# EAGLE board overallPCB (EAGLE 9.0.1)
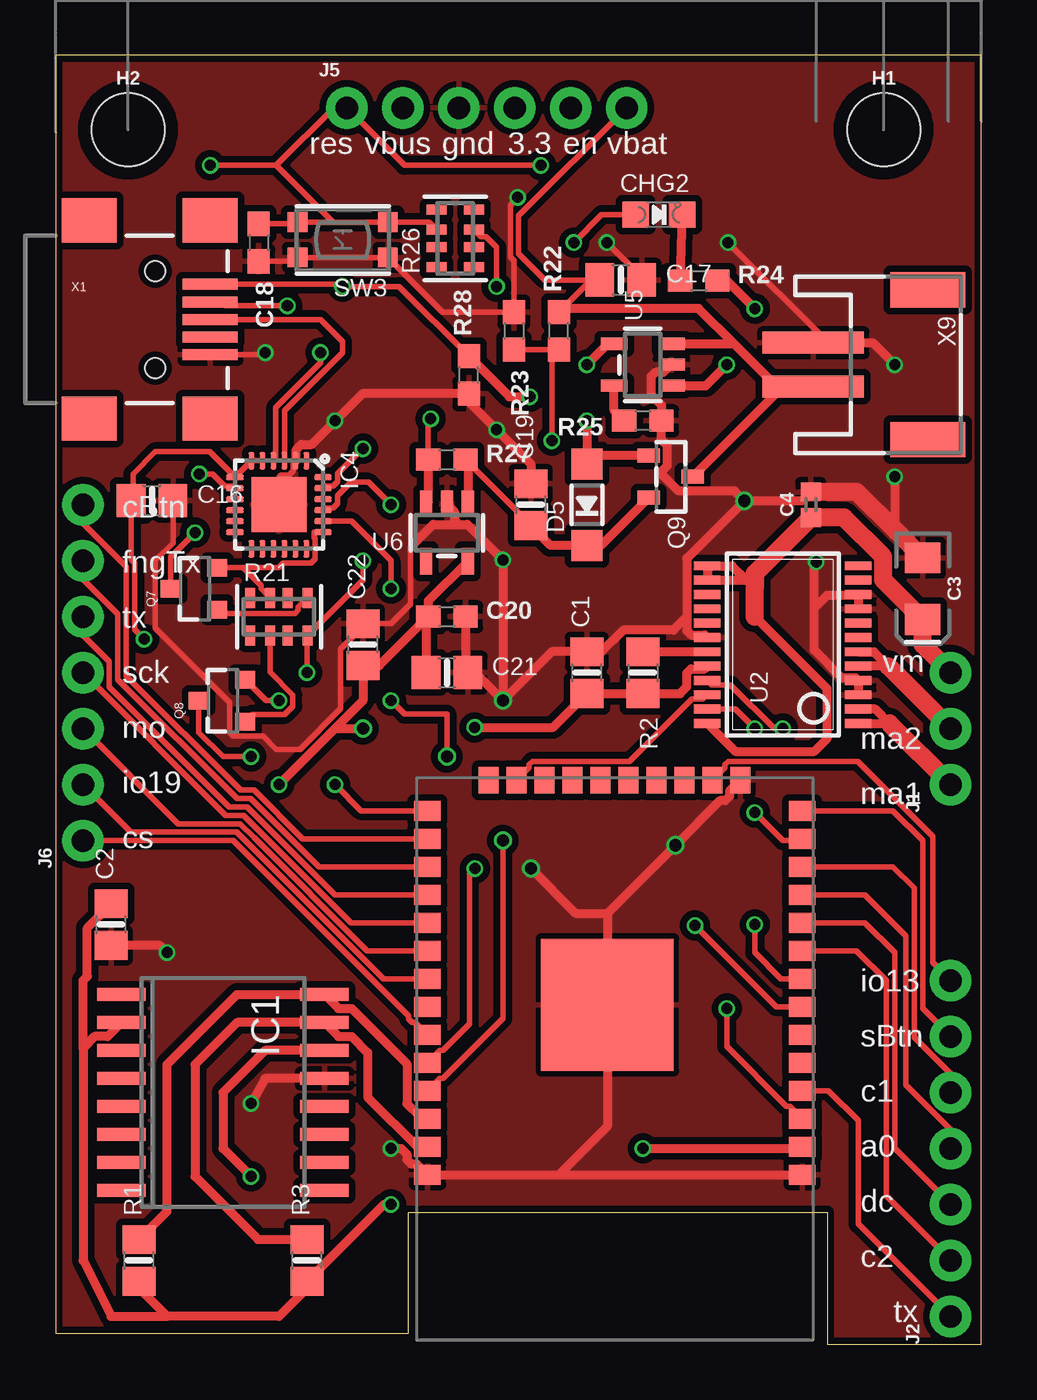
[diagram p0: board, top side]
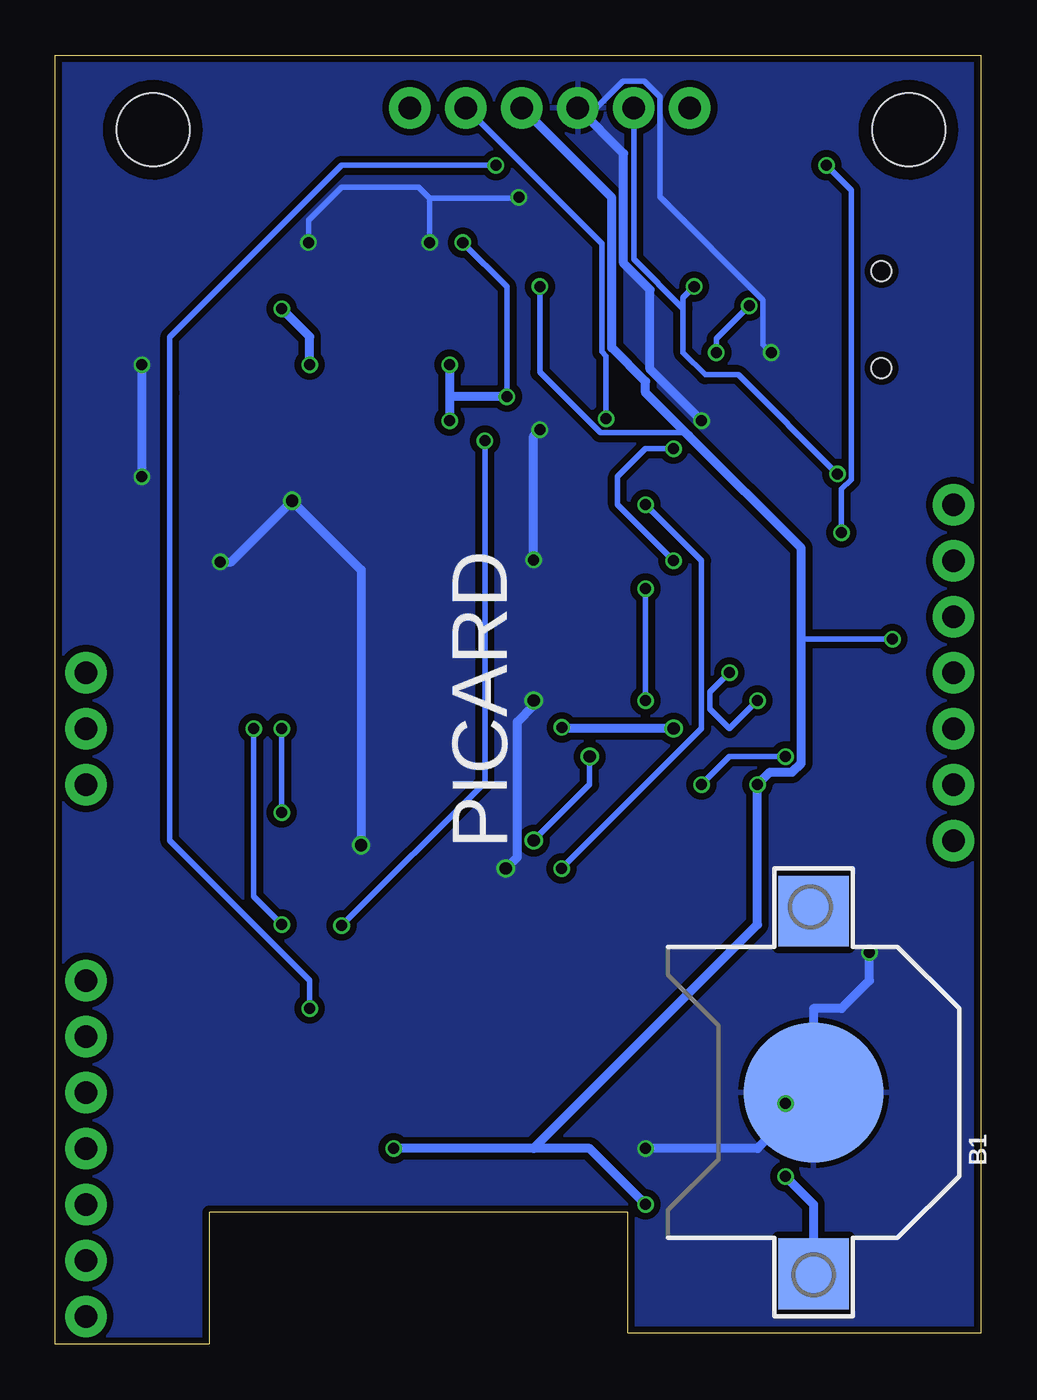
[diagram p1: board, bottom side, seen from below]

Size 42.04 x 58.5 mm. Coordinates in mm from the lower left corner, seen from the top.
Outline: 0.04,58.36 0.04,0.5 16.04,0.5 16.04,6 35.04,6 35.04,0 42.04,0 42.04,58.5 0.04,58.5 0.04,58.36
Outline: 0.04,58.36 0,58.36
Copper layers (1*16): Top 0.035mm / dielectric 1.5mm / Bottom 0.035mm
Design rules "SparkFun *": minimum track width 3.5mil, minimum drill 0.2mm, track to track 5mil, track to pad 5mil, pad to pad 5mil, via to via 5mil, smd to smd 5mil, copper to edge 8mil, drill to drill 8mil, minimum pad ring 12mil, minimum via ring 3mil, stop-mask expansion 4mil, vias tented up to drill 20mil, thermal gap 10mil

## Footprints (pad centres in the part's own frame; a part is rotated, then mirrored left to right if it is on the bottom)
CR1220 = smd 3.2 x 3.2: +$1 -8.225,0; +$2 8.225,0 | smd 6.35 x 6.35: - 0,0
0805-NO = smd 1.3 x 1.5: 1 -0.95,0; 2 0.95,0
EIA3216 = smd 1.4 x 1.6: + 1.4,0; - -1.4,0
0402 = smd 0.85 x 0.9: 1 -0.58,0; 2 0.58,0
0603-NO = smd 1.1 x 1: 1 -0.85,0; 2 0.85,0
CHIPLED_0805_NOOUTLINE = smd 1.2 x 1.2: A 0,-1.05; C 0,1.05
SOD-123 = smd 1.4 x 1.4: A 1.85,0; C -1.85,0
STAND-OFF = hole 3.302: 0,0
SO16W = smd 0.6 x 2.2: 1 -4.445,-4.6; 2 -3.175,-4.6; 3 -1.905,-4.6; 4 -0.635,-4.6; 5 0.635,-4.6; 6 1.905,-4.6; 7 3.175,-4.6; 8 4.445,-4.6; 9 4.445,4.6; 10 3.175,4.6; 11 1.905,4.6; 12 0.635,4.6; 13 -0.635,4.6; 14 -1.905,4.6; 15 -3.175,4.6; 16 -4.445,4.6
QFN24_4MM_SMSC = smd 0.8 x 0.28: 1 -2,1.25; 2 -2,0.75; 3 -2,0.25; 4 -2,-0.25; 5 -2,-0.75; 6 -2,-1.25; 13 2,-1.25; 14 2,-0.75; 15 2,-0.25; 16 2,0.25; 17 2,0.75; 18 2,1.25 | smd 0.28 x 0.8: 7 -1.25,-2; 8 -0.75,-2; 9 -0.25,-2; 10 0.25,-2; 11 0.75,-2; 12 1.25,-2; 19 1.25,2; 20 0.75,2; 21 0.25,2; 22 -0.25,2; 23 -0.75,2; 24 -1.25,2 | smd 2.5 x 2.5: THERM 0,0
1X03_NO_SILK = drill 1.016 pad 1.88: 1 0,0; 2 2.54,0; 3 5.08,0
1X07_NO_SILK = drill 1.016 pad 1.88: 1 0,0; 2 2.54,0; 3 5.08,0; 4 7.62,0; 5 10.16,0; 6 12.7,0; 7 15.24,0
1X06_NO_SILK = drill 1.016 pad 1.88: 1 0,0; 2 2.54,0; 3 5.08,0; 4 7.62,0; 5 10.16,0; 6 12.7,0
SOT23-3 = smd 0.8 x 0.9: 1 -0.95,-1; 2 0.95,-1; 3 0,1.1
SOT23-R = smd 0.635 x 1.016: 1 -0.95,-1; 2 0.95,-1; 3 0,1
RESPACK_4X0603 = smd 0.45 x 0.9: 1 -1.3,-0.85; 2 -0.4,-0.85; 3 0.4,-0.85; 4 1.3,-0.85; 5 1.3,0.85; 6 0.4,0.85; 7 -0.4,0.85; 8 -1.3,0.85
BTN_KMR2_4.6X2.8 = smd 0.9 x 0.9: A 2.05,0.8; A' -2.05,0.8; B 2.05,-0.8; B' -2.05,-0.8
SSOP24 = smd 0.4 x 1.2: 1 -3.575,-3.42; 2 -2.925,-3.42; 3 -2.275,-3.42; 4 -1.625,-3.42; 5 -0.975,-3.42; 6 -0.325,-3.42; 7 0.325,-3.42; 8 0.975,-3.42; 9 1.625,-3.42; 10 2.275,-3.42; 11 2.925,-3.42; 12 3.575,-3.42; 13 3.575,3.42; 14 2.925,3.42; 15 2.275,3.42; 16 1.625,3.42; 17 0.975,3.42; 18 0.325,3.42; 19 -0.325,3.42; 20 -0.975,3.42; 21 -1.625,3.42; 22 -2.275,3.42; 23 -2.925,3.42; 24 -3.575,3.42
SOT23-5 = smd 0.55 x 1.2: 1 -0.95,-1.3; 2 0,-1.3; 3 0.95,-1.3; 4 0.95,1.3; 5 -0.95,1.3
USB-MINIB = smd 2.5 x 0.5: D+ 2.5,0; D- 2.5,0.8; GND 2.5,-1.6; ID 2.5,-0.8; VBUS 2.5,1.6 | smd 2.5 x 2: MTN1 -3,4.5; MTN2 2.5,4.5; MTN3 -3,-4.5; MTN4 2.5,-4.5 | hole 0.9: 0,2.2; 0,-2.2
WROOM32_SKINNY = smd 1.2 x 0.9: 1 -8.5,5; 2 -8.5,3.73; 3 -8.5,2.46; 4 -8.5,1.19; 5 -8.5,-0.08; 6 -8.5,-1.35; 7 -8.5,-2.62; 8 -8.5,-3.89; 9 -8.5,-5.16; 10 -8.5,-6.43; 11 -8.5,-7.7; 12 -8.5,-8.97; 13 -8.5,-10.24; 14 -8.5,-11.51; 25 8.5,-11.51; 26 8.5,-10.24; 27 8.5,-8.97; 28 8.5,-7.7; 29 8.5,-6.43; 30 8.5,-5.16; 31 8.5,-3.89; 32 8.5,-2.62; 33 8.5,-1.35; 34 8.5,-0.08; 35 8.5,1.19; 36 8.5,2.46; 37 8.5,3.73; 38 8.5,5 | smd 0.9 x 1.2: 15 -5.7,-12.9; 16 -4.43,-12.9; 17 -3.16,-12.9; 18 -1.89,-12.9; 19 -0.62,-12.9; 20 0.65,-12.9; 21 1.92,-12.9; 22 3.19,-12.9; 23 4.46,-12.9; 24 5.73,-12.9 | smd 6 x 6: P$1 0.34,-2.7
JSTPH2 = smd 1 x 4.6: 1 -1,-3.7; 2 1,-3.7 | smd 1.6 x 3.4: NC1 -3.4,1.5; NC2 3.4,1.5

## Placement (x,y rotation side)
B1  CR1220  [CR1220]  7.62,11.43 90 bottom
C1  10µF  [0805-NO]  24.13,30.48 90 top
C2  1uF  [0805-NO]  2.54,19.05 90 top
C3  10uF  [EIA3216]  39.37,34.29 270 top
C4  0.1uF  [0402]  34.29,38.1 90 top
C16  10uF  [0805-NO]  4.4,38.29 0 top
C17  10µF  [0805-NO]  25.67,48.3 0 top
C18  1uF  [0603-NO]  9.24,49.99 270 top
C19  10µF  [0805-NO]  21.59,38.1 90 top
C20  1uF  [0603-NO]  17.78,33.02 0 top
C21  10µF  [0805-NO]  17.78,30.48 0 top
C22  10uF  [0805-NO]  13.97,31.75 90 top
CHG2  ORANGE  [CHIPLED_0805_NOOUTLINE]  27.4,51.26 270 top
D5  MBR120  [SOD-123]  24.13,38.1 90 top
H1  STAND-OFF  [STAND-OFF]  37.6,55.11 0 top
H2  STAND-OFF  [STAND-OFF]  3.31,55.11 0 top
IC1  DS3231/SO  [SO16W]  7.62,11.43 270 top
IC4  CP2104  [QFN24_4MM_SMSC]  10.16,38.1 270 top
J1  [1X03_NO_SILK]  40.64,25.4 90 top
J2  [1X07_NO_SILK]  40.64,1.27 90 top
J5  [1X06_NO_SILK]  13.24,56.11 0 top
J6  [1X07_NO_SILK]  1.27,22.86 90 top
Q7  mmbt2222  [SOT23-3]  6.35,34.29 90 top
Q8  mmbt2222  [SOT23-3]  7.62,29.21 90 top
Q9  DMG3415U  [SOT23-R]  27.94,39.37 270 top
R1  10K  [0805-NO]  3.81,3.81 90 top
R2  10K  [0805-NO]  26.67,30.48 270 top
R3  10K  [0805-NO]  11.43,3.81 90 top
R21  10K  [RESPACK_4X0603]  10.16,33.02 0 top
R22  100K  [0603-NO]  22.86,45.99 90 top
R23  100K  [0603-NO]  20.82,45.99 270 top
R24  1K  [0603-NO]  29.21,48.26 0 top
R25  4.7K  [0603-NO]  26.67,41.91 180 top
R26  10K  [RESPACK_4X0603]  18.16,50.18 90 top
R27  100K  [0603-NO]  17.78,40.14 0 top
R28  100K  [0603-NO]  18.78,43.99 90 top
SW3  KMR2  [BTN_KMR2_4.6X2.8]  13.05,50.12 180 top
U2  TB6612 SSOP  [SSOP24]  33.02,31.75 90 top
U5  MCP73831T-2ACI/OT  [SOT23-5]  26.67,44.45 90 top
U6  AP2112-3.3  [SOT23-5]  17.78,36.83 180 top
X1  Micro USB  [USB-MINIB]  4.54,46.5 0 top
X7  ESP32_WROOM32_SKINNY  [WROOM32_SKINNY]  25.4,12.7 180 top
X9  JSTPH  [JSTPH2]  38.1,44.45 270 top

## Library data of the parts
B1 C1 C2 C16-C22 CHG2 D5 IC4 Q9 R1-R3 R21-R28 SW3 U2 U5 U6 X7 X9 = microbuilder
C3 = SparkFun-Capacitors; PROD_ID: CAP-00811
C4 = SparkFun-Capacitors; PROD_ID: CAP-12416
H1 H2 = SparkFun-Hardware
IC1 = adafruit
J1 J2 J6 = SparkFun-Connectors
J5 = SparkFun-Connectors; PROD_ID: CONN-08437
Q7 Q8 X1 = SparkFun

## Nets
3.3V: C1.1 C2.2 C16.1 C20.1 C21.1 C22.1 IC1.2 IC4.5 IC4.6 IC4.7 J5.4 R1.1 R2.2 R3.1 R26.3 U2.20 U6.5 X7.2
A0_DAC2: J2.4 X7.11
A4_IO36: J2.1 X7.4
A13_I35: R22.1 R23.2 X7.7
AIN1: U2.21 X7.8
AIN2: U2.22 X7.23
CONTROL_BUTTON: J6.7 X7.26
DTR: IC4.23 Q8.2 R21.4
EN: J5.5 R27.1 U6.3
FINGERPRINT_RX: J6.5 X7.28
FINGERPRINT_TX: J6.6 X7.27
GND: B1.- C1.2 C2.1 C3.- C4.2 C16.2 C17.2 C18.2 C19.2 C20.2 C21.2 C22.2 IC1.13 IC4.2 IC4.THERM J5.3 R23.1 R25.1 R28.1 SW3.A SW3.A' U2.3 U2.4 U2.9 U2.10 U2.18 U5.2 U6.2 X1.GND X7.1 X7.15 X7.38 X7.P$1 X9.1
GPIO0: Q8.3 X7.25
GPIO19: J6.2 X7.31
IO13_A12: J2.7 X7.16
MA1: J1.1 U2.1 U2.2
MA2: J1.2 U2.5 U2.6
MOTOR_C1: J2.5 X7.12
MOTOR_C2: J2.2 X7.9
N$19: Q7.1 R21.5
N$20: Q8.1 R21.2
N$21: IC4.3 X1.D+
N$22: IC4.4 X1.D-
N$23: CHG2.C R24.1
N$24: R24.2 U5.1
N$25: R25.2 U5.5
N$26: C19.1 D5.C Q9.2 R27.2 U6.1
OLED_CS: J6.1 X7.33
OLED_DC: J2.3 X7.10
OLED_MOSI: J6.3 X7.30
OLED_SCK: J6.4 X7.29
PWMA: U2.23 X7.13
RESET: C18.1 J5.1 Q7.3 R26.6 SW3.B SW3.B' X7.3
RTCBAT: B1.+$1 IC1.14
RTS: IC4.19 Q7.2 R21.7
RXD0: IC4.21 X7.34
SCANNER_BUTTON: J2.6 X7.14
SCL: IC1.16 R1.2 X7.36
SDA: IC1.15 R3.2 X7.37
STBY: R2.1 U2.19
TXD0: IC4.20 X7.35
VBAT: C17.1 J5.6 Q9.3 R22.2 U5.3 X9.2
VBUS: CHG2.A D5.A IC4.8 J5.2 Q9.1 R28.2 U5.4 X1.VBUS
VM+: C3.+ C4.1 J1.3 U2.13 U2.14 U2.24

## Tracks (layer width: path | path; a pad name or v marks a point on that pad's centre or on a via)
3.3V  (via drill 0.5, 0.55)
  Top 0.254: IC4.5 IC4.6 IC4.7 7.01,40.5 4.54,40.5 3.54,39.5 3.54,38.38 C16.1 3.45,35.61 3.61,35.45 3.61,32.43 v4.04,32 | R26.3 19.33,50.26 19.57,50.26 20.04,49.78 v20.04,48
  Top 0.406: 5.08,1.27 10.16,1.27 11.43,2.54 R3.1 14.92,6.35 v15.24,6.35 | 5.08,1.27 3.81,2.54 R1.1 | IC1.2 2.38,13.96 1.78,13.96 1.27,13.45 | 1.27,13.45 1.27,3.81 2.54,1.27 5.08,1.27 | 1.27,13.45 1.27,16.51 1.46,16.7 1.46,18.89 2.54,19.97 C2.2 2.54,20.32 | v26.67,8.89 33.82,8.89 X7.2 | U2.20 29.48,30.66 28.86,30.66 28.67,30.46 28.67,29.84 28.35,29.53 R2.2 C1.1 22.6,28 v19.04,28 | C20.1 16.83,32.92 C21.1 | U6.5 16.93,33.73 C20.1 | v10.16,25.4 12.7,27.94 | 12.7,27.94 v13.97,27.94 | C20.1 14.71,30.8 C22.1 13.97,29.21 12.7,27.94
  Bottom 0.254: v4.04,32 8.18,32 | 13.3,41.24 13.43,41.37 17.3,41.37 20.04,44.11 v20.04,48
  Bottom 0.406: v15.24,6.35 17.78,8.89 20.32,8.89 | 20.32,8.89 v26.67,8.89 | 20.32,8.89 10.16,19.05 v10.16,25.4 9.6,25.96 8.6,25.96 8.18,26.38 8.18,32 8.18,36.12 13.3,41.24 15.24,43.18 15.24,43.7 16.77,45.23 16.77,52.02 J5.4 | v13.97,27.94 18.98,27.94 v19.04,28
A0_DAC2
  Top 0.254: J2.4 40.64,9.74 38.61,11.77 38.61,18.54 36.75,20.4 X7.11
A4_IO36
  Top 0.254: 34.21,11.34 34.21,11.51 35.1,11.51 36.45,10.16 36.45,5.46 J2.1
  Top 0.406: X7.4 34.21,11.51 34.21,11.45
A13_I35  (via drill 0.5)
  Top 0.254: X7.7 32.72,15.32 v29.04,19 | v22.54,41 22.54,44.82 R22.1 R23.2
  Bottom 0.254: v29.04,19 22.54,25.5 v22.54,41
AIN1  (via drill 0.5)
  Top 0.254: U2.21 29.8,29.93 30.65,29.93 32.64,27.94 v33.02,27.94 | v31.75,19.05 31.75,17.78 32.94,16.59 X7.8
  Bottom 0.254: v33.02,27.94 33.02,20.32 v31.75,19.05
AIN2
  Top 0.254: U2.22 29.4,29.28 28.9,29.28 26.07,26.45 21.65,26.45 21.51,26.3 21.51,26.17 X7.23
CONTROL_BUTTON
  Top 0.254: X7.26 11.24,22.94 9.04,25.15 8.41,25.15 3.23,30.33 3.23,35.29 1.27,37.25 J6.7
DTR  (via drill 0.5)
  Top 0.254: Q8.2 9.57,29.21 v10.16,29.21 | v11.43,30.48 11.43,32.14 R21.4 13.97,34.68 v13.97,35.56 | v13.97,40.64 13.95,40.64 12.81,39.5 12.81,39.15 12.62,38.96 12.27,38.96 IC4.23
  Bottom 0.254: v10.16,29.21 11.43,27.94 12.32,28.83 12.32,29.59 v11.43,30.48 | v13.97,35.56 16.51,38.1 16.51,39.37 15.24,40.64 v13.97,40.64
EN  (via drill 0.5)
  Top 0.254: 16.93,38.23 U6.3 | R27.1 16.93,41.89 v17.04,42
  Top 0.406: R27.1 16.93,38.23
  Bottom 0.254: v17.04,42 17.04,44.85 17.23,45.04 17.23,49.94 J5.5
FINGERPRINT_RX
  Top 0.254: X7.28 12.71,20.4 8.72,24.38 7.9,24.38 2.46,29.82 2.46,30.97 1.27,32.17 J6.5
FINGERPRINT_TX
  Top 0.254: X7.27 11.97,21.67 8.88,24.77 8.26,24.77 2.84,30.18 2.84,33.13 1.27,34.71 J6.6
GND  (via drill 0.5, 0.55)
  Top 0.254: 23.7,31 C1.2 | IC4.THERM 10.16,39.35 10.26,39.45 10.61,39.45 10.8,39.64 10.8,39.99 IC4.2 | C16.2 5.35,36.37 4.55,35.56 4.55,32.49 7.92,29.12 7.92,27.75 8.07,27.61 9.43,27.61 10.04,27 11.11,27 12.97,28.85 12.97,31.55 14.15,32.74 14.15,32.88 | X1.GND 9.44,44.9 v9.54,45 | C18.2 10.82,49.14 SW3.A SW3.A' 17.58,46.84 R23.1 20.82,49.18 20.66,49.34 20.66,51.72 v20.99,52.05 | C17.2 26.62,48.42 v25.04,50 | 36.04,45.45 35.09,45.45 v30.54,50 | C22.2 15.24,32.7 16.13,33.59 16.13,36.17 16.23,36.27
  Top 0.406: IC1.13 9.52,12.06 v8.89,10.93 | U2.10 36.44,34 | 36.44,34 U2.9 | 22.86,7.7 X7.38 16.41,8.19 16.16,8.19 15.97,8.38 15.97,8.63 15.71,8.89 v15.24,8.89 | 22.86,7.7 X7.1 | v5.08,17.78 4.76,18.1 C2.1 | U2.3 U2.4 36.32,30.24 35.71,30.24 34.45,31.5 34.45,33.41 | 25.06,19.56 X7.P$1 25.06,9.9 22.86,7.7 | X7.15 30.61,25.11 30.61,24.86 30.42,24.67 30.17,24.67 v28.15,22.65 25.06,19.56 | C4.2 33.88,38.27 v31.28,38.27 | 28.67,33.02 28.67,35.66 v31.28,38.27 | 28.67,33.02 28.67,32.39 28.86,32.2 29.48,32.2 U2.18 | 28.67,33.02 28.06,32.41 25.78,32.41 24.8,31.43 C1.2 22.54,31.43 v20.32,29.21 | v21.59,21.59 23.62,19.56 25.06,19.56 | v20.32,29.21 19.05,30.48 | 19.05,30.48 C21.2 | C20.2 18.63,30.9 19.05,30.48 | v20.32,29.21 v20.32,35.59 18.71,37.2 18.32,37.2 | U6.2 18.12,37.78 18.12,37.39 18.32,37.2 | 12.7,41.89 v12.7,41.91 | IC4.2 10.94,40.13 10.94,40.6 11.17,40.83 11.64,40.83 12.7,41.89 | U5.2 27.96,44.47 27.6,44.1 27.23,44.1 27.04,43.91 27.04,43.09 27.52,42.61 R25.1 27.52,41.03 27.78,40.77 27.78,39.87 27.52,39.61 27.52,39.5 28.29,38.72 30.84,38.72 v31.28,38.27 | C22.2 14.15,32.88 | 16.23,36.27 17.16,37.2 18.32,37.2 | X9.1 36.04,45.45 37.1,45.45 v38.1,44.45 | v38.1,39.37 38.1,36.96 38.16,36.9 | C19.2 21.59,39.95 v20.04,41.5 18.78,42.76 R28.1 13.95,43.14 12.7,41.89 | 34.45,33.41 35.04,34 36.44,34 | 34.45,33.41 34.45,35.41 v34.54,35.5
  Top 0.813: C3.- 38.16,36.9 36.38,38.68 C4.2
  Bottom 0.254: v25.04,50 25.04,52 | 25.04,52 25.54,52.5 29.04,52.5 30.54,51 v30.54,50 | v9.54,45 9.91,45.37 9.91,47.39 14.59,52.06 14.59,56.6 15.29,57.3 16.27,57.3 17.47,56.11 J5.3 | v20.99,52.05 21.04,52 25.04,52
  Bottom 0.406: v8.89,10.93 B1.- | B1.- 7.62,15.24 6.35,15.24 5.08,16.51 v5.08,17.78 | B1.- 10.16,8.89 v15.24,8.89 | v31.28,38.27 31.27,38.27 | 31.27,38.27 28.15,35.14 v28.15,22.65 | v21.59,21.59 21.06,22.12 21.06,28.25 20.32,28.99 v20.32,29.21 | v38.1,44.45 v38.1,39.37 | v12.7,41.91 15.04,44.25 15.04,47.85 16.24,49.05 16.24,54.03 J5.3 | v20.32,35.59 20.32,41.22 v20.04,41.5 | v34.54,35.5 34.04,35.5 31.27,38.27
  pour Bottom (isolate 0.305): 35.04,6 16.04,6 16.04,0.5 0.04,0.5 0.04,1 0.04,58.5 42.04,58.5 42.04,57.5 42.04,0 41.54,0 35.04,0
  pour Top (isolate 0.305): 16.04,6 35.04,6 35.04,0 42.04,0 42.04,58.5 0.04,58.5 0.04,57 0.04,0.5 16.04,0.5
GPIO0  (via drill 0.5)
  Top 0.254: X7.25 13.89,24.21 v12.7,25.4 | Q8.3 6.52,27.77 7.62,26.67 v8.89,26.67
  Bottom 0.254: v12.7,25.4 11.43,26.67 v8.89,26.67
GPIO19
  Top 0.254: X7.31 14.9,16.59 8.25,23.24 3.43,23.24 J6.2
IO13_A12
  Top 0.254: J2.7 39.83,17.32 39.83,23.05 36.42,26.45 30.54,26.45 30.4,26.3 30.4,26.17 X7.16
MA1
  Top 0.406: U2.1 37.87,28.18 37.21,28.82 U2.2
  Top 0.813: 37.87,28.18 J1.1
MA2
  Top 0.406: U2.6 37.15,31.43 37.8,30.77 U2.5
  Top 0.813: J1.2 37.8,30.77
MOTOR_C1
  Top 0.254: J2.5 40.64,12.28 38.99,13.93 38.99,20.7 38.02,21.67 X7.12
MOTOR_C2
  Top 0.254: J2.2 37.72,6.73 37.72,16.51 36.37,17.86 X7.9
  Top 0.406: 34.29,17.72 34.29,17.78 34.21,17.86 | 34.21,17.86 X7.9 | 34.21,17.8 34.21,17.86
N$19
  Top 0.254: R21.5 11.04,33.45 11.04,33.31 10.89,33.17 7.52,33.17 Q7.1
N$20
  Top 0.254: R21.2 9.76,30.5 10.79,29.47 10.79,28.95 10.42,28.58 8.94,28.58 Q8.1
N$21
  Top 0.254: IC4.3 10.41,42.37 13.04,45 13.04,45.5 12.04,46.5 X1.D+
N$22  (via drill 0.5)
  Top 0.254: IC4.4 10.02,40.21 10.02,42.52 12.04,44.54 v12.04,45 | v10.54,47.13 7.71,47.13 X1.D-
  Bottom 0.254: v12.04,45 12.04,45.63 v10.54,47.13
N$23
  Top 0.406: CHG2.C R24.1
N$24  (via drill 0.5)
  Top 0.406: U5.1 29.53,43.5 v30.48,44.45 | v31.75,46.99 30.48,48.26 R24.2
  Bottom 0.406: v30.48,44.45 30.48,45.72 v31.75,46.99
N$25
  Top 0.406: R25.2 25.37,42.36 U5.5
N$26
  Top 0.254: 18.63,38.23 U6.1 | R27.2 21.64,37.13 21.64,37.1
  Top 0.406: C19.1 21.64,37.1 22.49,36.25 D5.C 24.77,36.25 Q9.2 | R27.2 18.73,40.04 U6.1
OLED_CS
  Top 0.254: J6.1 8.09,22.86 16.05,14.9 16.05,14.77 16.2,14.62 16.33,14.62 X7.33
OLED_DC
  Top 0.254: J2.3 38.1,8.89 38.1,17.78 36.75,19.13 X7.10
OLED_MOSI
  Top 0.254: X7.30 14.17,17.86 9.03,23 8.41,23.62 5.59,23.62 J6.3
OLED_SCK
  Top 0.254: X7.29 13.44,19.13 8.56,24 7.75,24 J6.4
PWMA  (via drill 0.5)
  Top 0.254: U2.23 30.87,28.82 v31.75,27.94 | v31.75,24.13 33.02,22.86 33.82,22.86 X7.13
  Bottom 0.254: v31.75,27.94 v31.75,24.13
RESET  (via drill 0.5)
  Top 0.254: X7.3 33.33,10.81 33.2,10.81 30.48,13.52 v30.48,15.24 | Q7.3 5.25,35.73 v6.35,36.83 | 12.62,50.92 SW3.B' 16.97,50.92 R26.6 | 12.62,50.92 SW3.B 10.92,50.84 C18.1 | v7.04,53.5 10.04,53.5 | 10.04,53.5 12.62,50.92 | 10.04,53.5 12.65,56.11 J5.1 15.85,53.5 v22.04,53.5
  Bottom 0.254: v30.48,15.24 30.48,16.51 36.83,22.86 36.83,43.18 36.83,45.71 29.04,53.5 v22.04,53.5 | v6.35,36.83 6.35,38.8 5.91,39.24 5.91,52.37 v7.04,53.5
RTCBAT  (via drill 0.5)
  Top 0.406: IC1.14 9.52,13.34 7.62,11.43 7.62,8.89 v8.89,7.62
  Bottom 0.406: v8.89,7.62 7.62,6.35 B1.+$1
RTS
  Top 0.254: R21.7 9.34,34.29 9.34,34.42 8.52,35.24 | Q7.2 8.52,35.24 | 8.52,35.24 10.14,35.24 10.34,35.45 11.61,35.45 11.8,35.64 11.8,36.56 11.75,36.62 11.75,36.85 IC4.19
RXD0  (via drill 0.5)
  Top 0.254: X7.34 17.47,13.35 17.6,13.35 18.8,14.54 18.8,21.34 v19.05,21.59 | v15.24,38.1 14.22,39.12 13.43,39.12 12.81,38.5 12.81,38.15 12.62,37.96 12.27,37.96 IC4.21
  Bottom 0.254: v19.05,21.59 12.7,27.94 12.7,35.56 v15.24,38.1
SCANNER_BUTTON
  Top 0.254: J2.6 39.37,15.24 39.37,22.86 38.02,24.21 X7.14
SCL
  Top 0.254: 16.51,10.16 16.59,10.24 X7.36
  Top 0.406: R1.2 5.08,6.03 5.08,12.7 8.26,15.88 IC1.16 12.86,15.23 13.46,15.23 15.97,12.72 15.97,10.92 16.51,10.38 16.51,10.16
SDA
  Top 0.254: 16.82,8.89 X7.37
  Top 0.406: R3.2 9.21,4.76 6.35,7.62 6.35,12.7 8.26,14.61 IC1.15 12.86,13.96 13.46,13.96 14.18,13.24 14.18,11.22 16.51,8.89 16.82,8.89
STBY
  Top 0.406: R2.1 U2.19
TXD0  (via drill 0.5, 0.55)
  Top 0.254: X7.35 17.47,12.08 17.6,12.08 20.32,14.79 v20.32,22.86 | v17.78,26.67 17.78,28.6 15.85,28.6 v15.24,29.21 | v15.24,34.29 15.24,35.56 13.45,37.35 IC4.20
  Bottom 0.254: v20.32,22.86 17.78,25.4 v17.78,26.67 | v15.24,34.29 v15.24,29.21
VBAT
  Top 0.254: 23.02,47 24.32,48.3 C17.1 22.24,48.3 21.04,49.5 21.04,51.21 J5.6
  Top 0.406: X9.2 33.02,43.45 32.88,43.31 | 32.88,43.31 Q9.3 | U5.3 30.8,45.4 | 30.8,45.4 32.88,43.31 | 30.8,45.4 29.2,47 23.02,47 R22.2
VBUS  (via drill 0.5)
  Top 0.254: IC4.8 8.05,38.96 7.7,38.96 7.15,39.5 v6.54,39.5 | X1.VBUS 12.94,48.1 v13.04,48 15.62,48 R28.2 | CHG2.A 24.8,51.26 v23.54,50
  Top 0.406: Q9.1 24.5,40.32 D5.A v24.13,41.91 | U5.4 25.08,45.4 v24.13,44.45 | R28.2 20.62,43 v21.54,43
  Bottom 0.254: v6.54,39.5 11.04,44 12.54,44 13.54,45 13.54,47 | v13.04,48 13.54,47.5 13.54,47 | 13.54,47 15.78,49.24 J5.2 | v23.54,50 21.54,48 v21.54,43
  Bottom 0.406: v24.13,44.45 24.13,43 | 24.13,43 v24.13,41.91 | v21.54,43 24.13,43
VM+
  Top 0.406: 31.37,34.67 30.71,35.33 U2.13 U2.14 31.37,34.67 | 31.37,34.67 31.75,34.29 | U2.24 30.86,26.91 34.45,26.91 35.04,27.5 35.04,29.73 31.75,33.02
  Top 0.813: 31.75,33.02 31.75,34.29 31.75,34.98 C4.1 35.8,37.52 37.57,35.75 37.57,34.69 C3.+ 39.37,31.75 J1.3

## Text on the board
tPlace: res | vbus | gnd | 3.3 | en | vbat | cBtn | fngTx | tx | sck | vm | mo | ma2 | io19 | ma1 | cs | io13 | sBtn | c1 | a0 | dc | c2 | tx
bPlace: PICARD